# Altium PCB Toygether_PCB.PcbDoc
Units mm, origin at the board's own origin, x right, y up, seen from the top; angles counter-clockwise.
Board outline 40 x 40 mm, 2 copper layers (Top Layer, Bottom Layer); 33 components, 33 nets, 150 pads, 0 vias.
Unrouted connection lines stored in the file: 58.
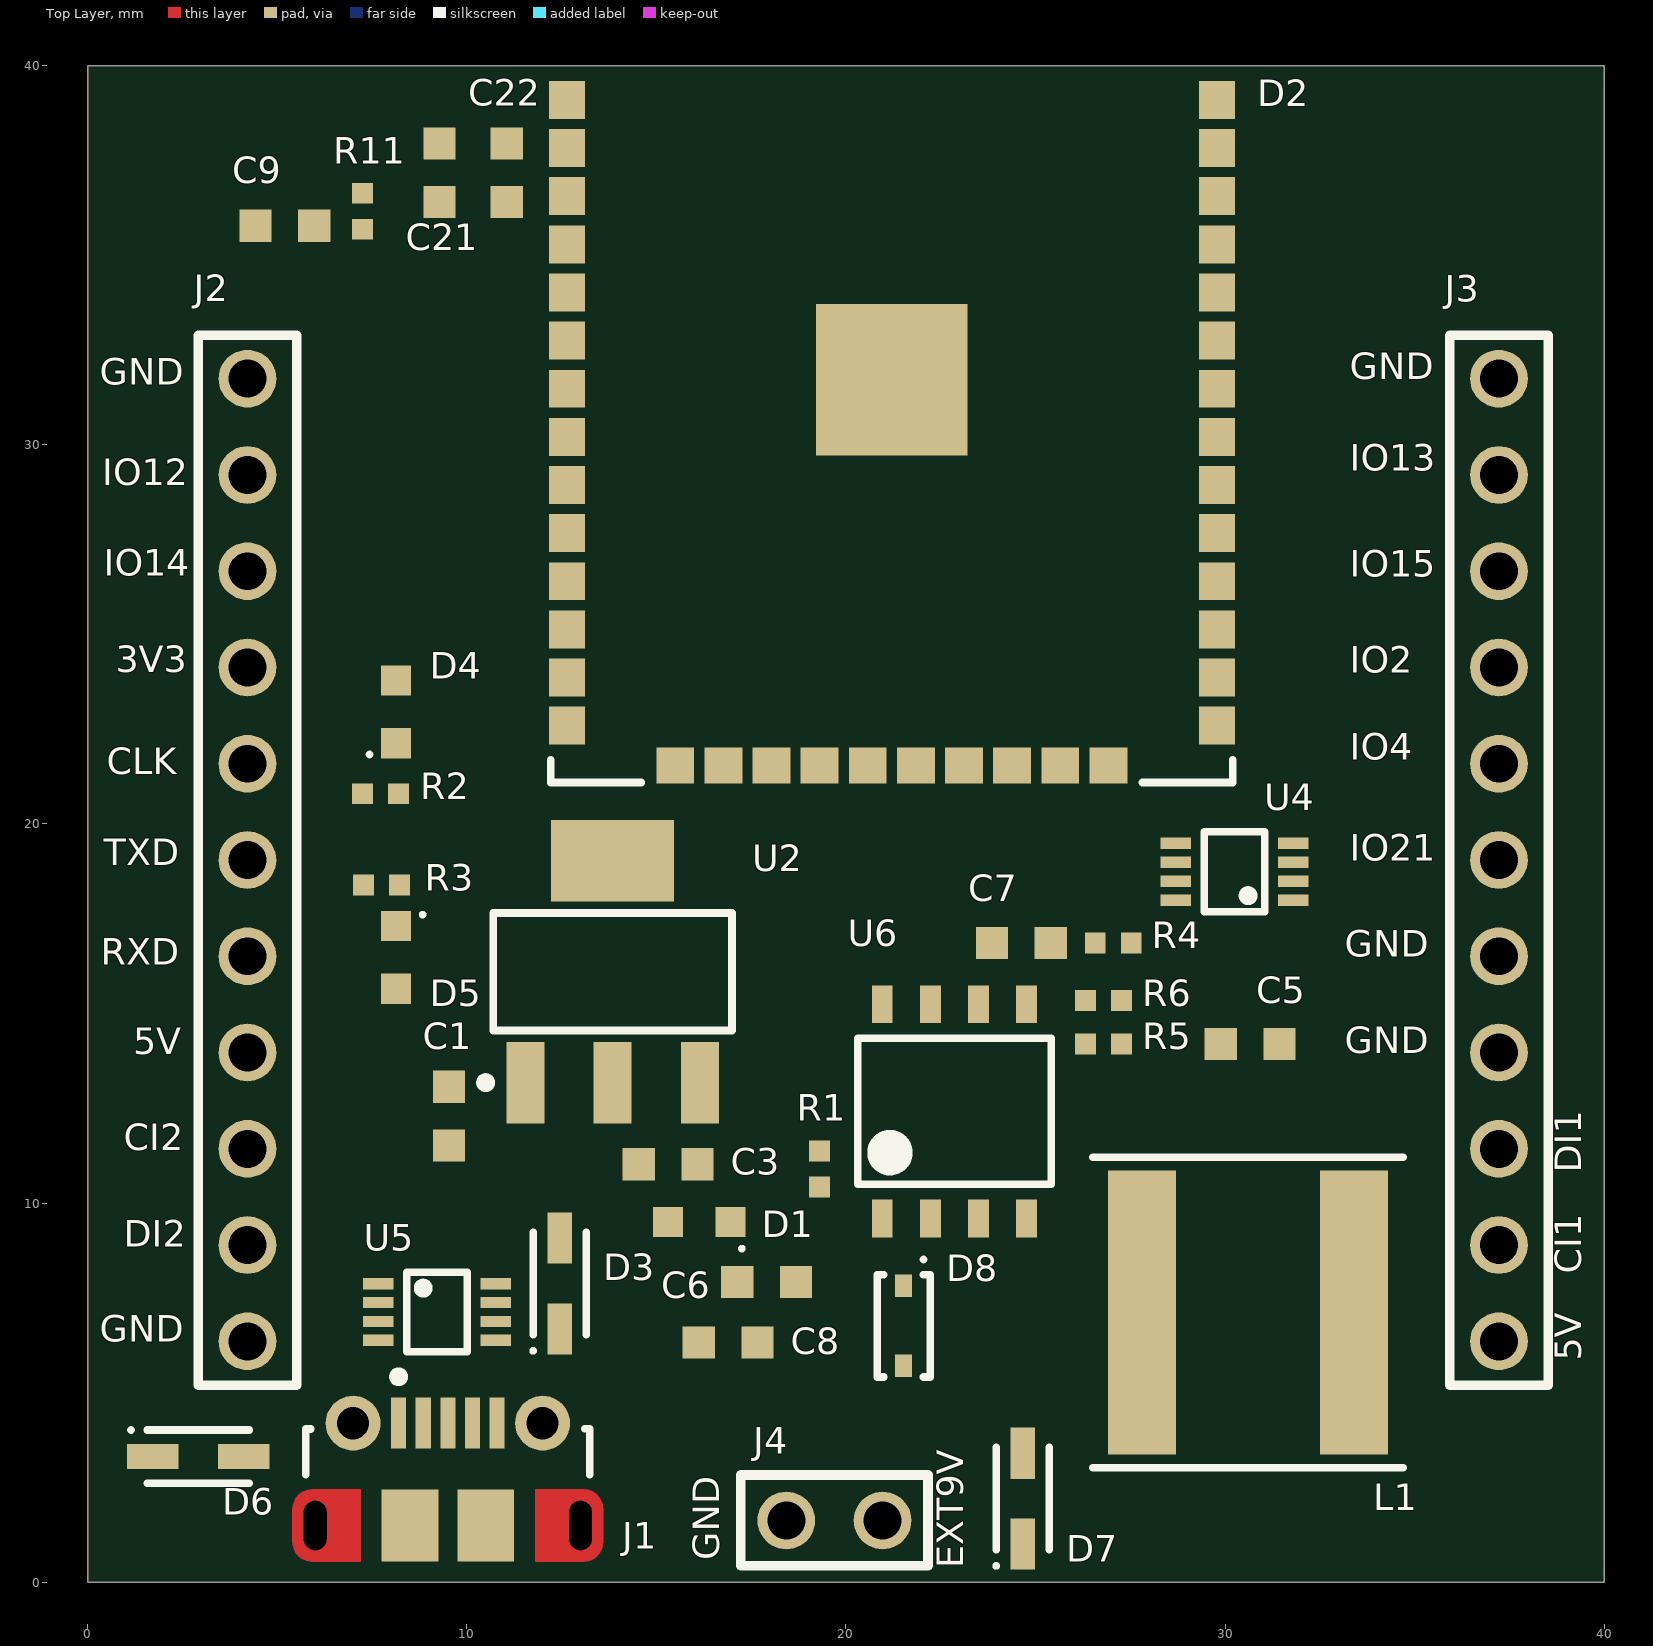
[diagram p0: Top Layer view]
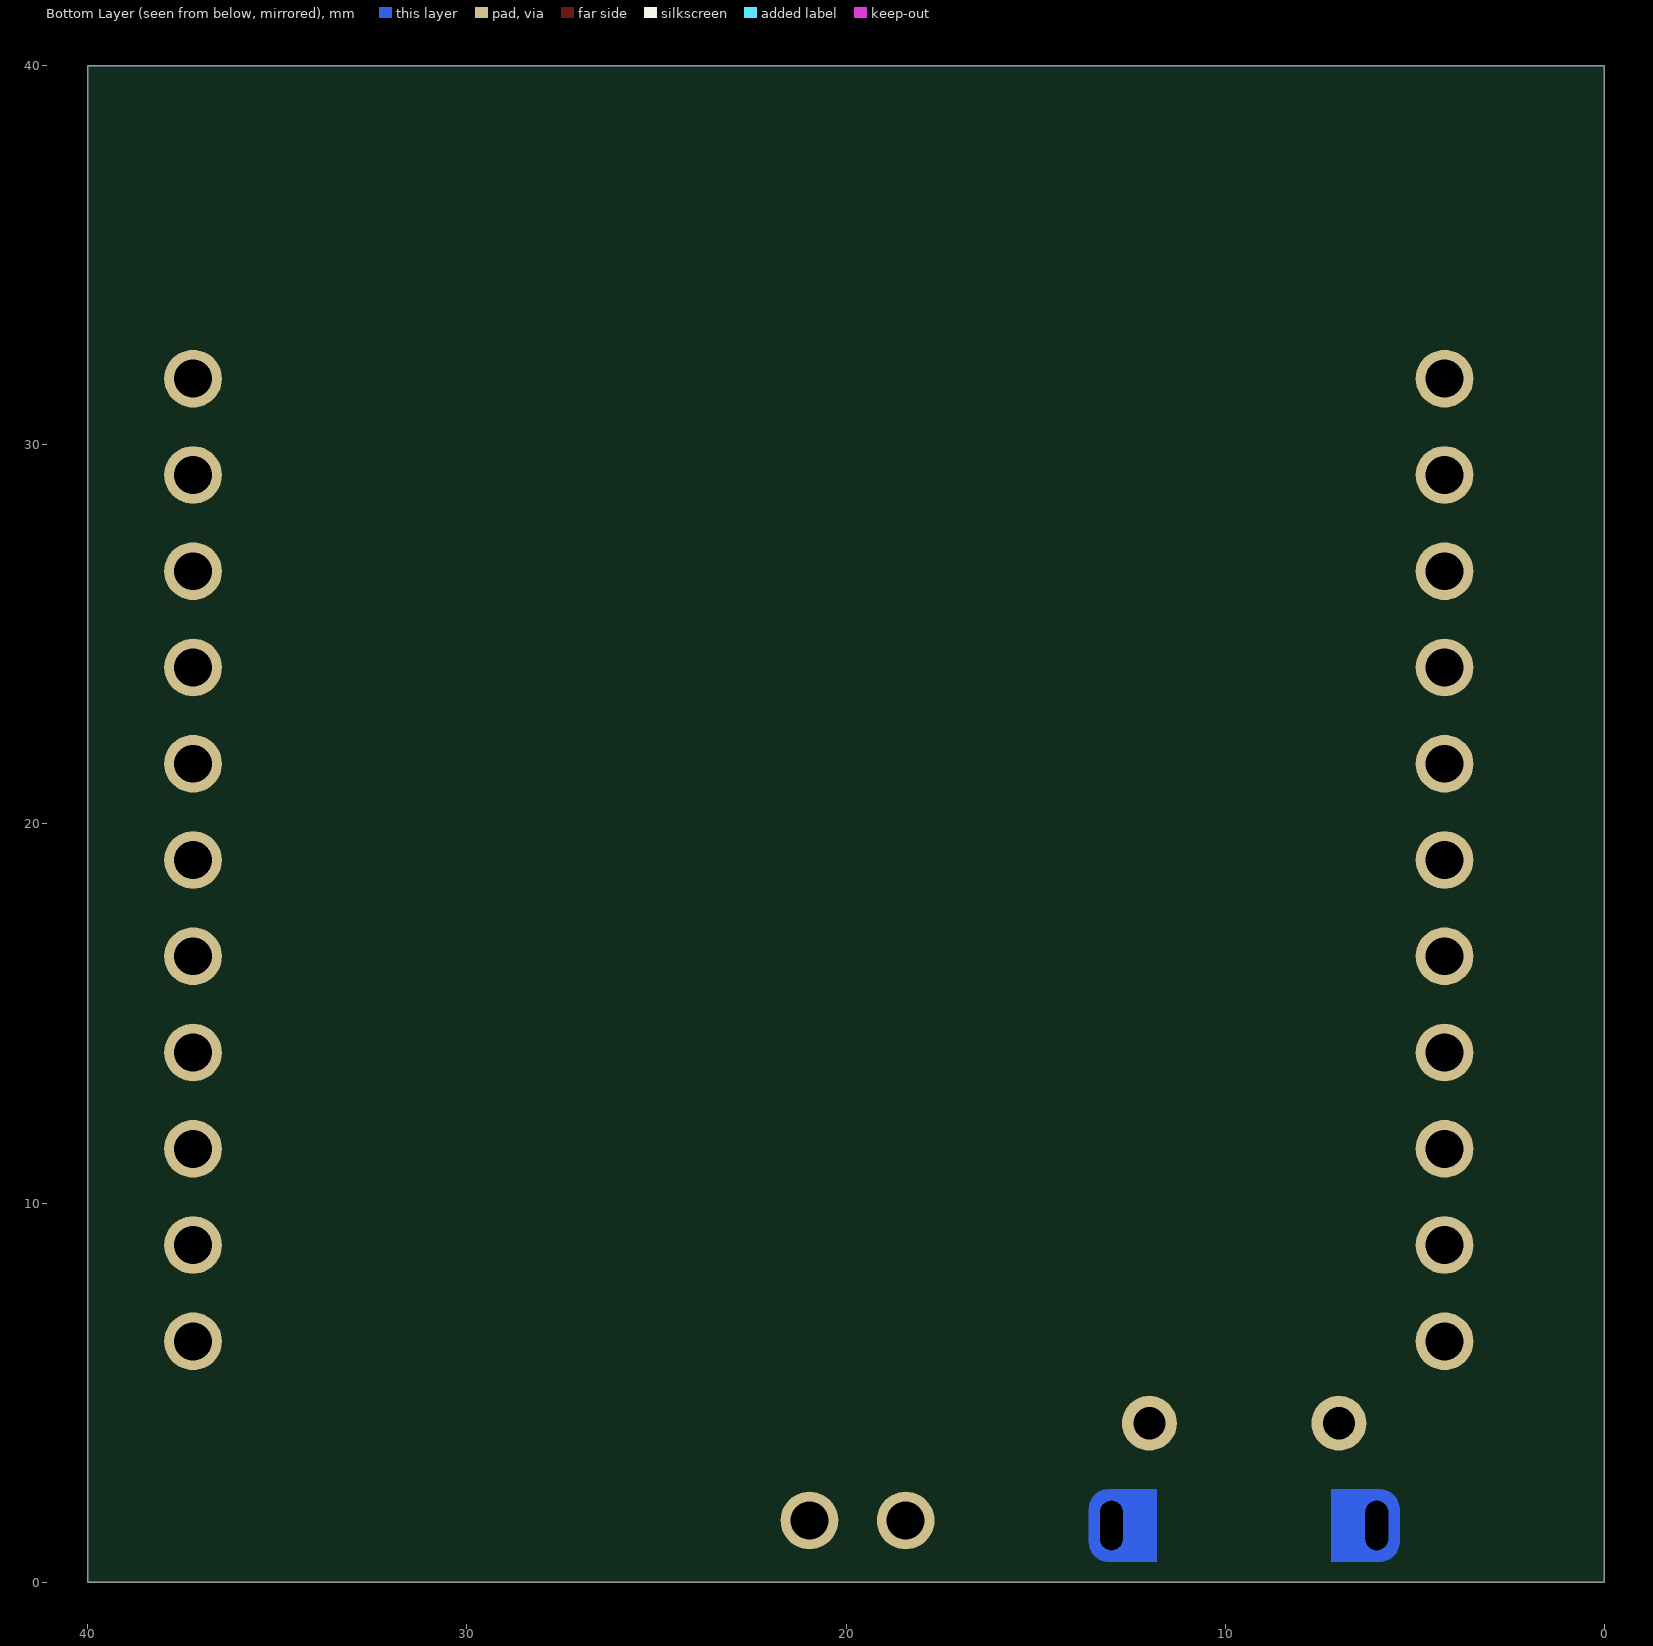
[diagram p1: Bottom Layer view, seen from below]

## Layer stack, top to bottom
Top Solder: solder mask 0.0102, Solder Resist, Dk 3.5
Top Layer: signal copper 0.0356
Dielectric 1: dielectric 0.32, FR-4, Dk 4.8
Bottom Layer: signal copper 0.0356
Bottom Solder: solder mask 0.0102, Solder Resist, Dk 3.5

## Board outline
0,0 40,0 40,40 0,40

## Design rules (kind name [scope] priority, off if disabled: settings)
BoardOutlineClearance [All] p1: gap=0.3 ignorepadtopadclearanceinfootprint=FALSE
Clearance Clearance_1 [All] p1: gap=0.15 ignorepadtopadclearanceinfootprint=TRUE
HoleSize [All] p1: absolutevalues=TRUE maxlimit=2.54 minlimit=0.3 maxpercent=80.000 minpercent=20.000
HoleToHoleClearance [All] p1: gap=0.5 allowstackedmicrovias=TRUE
MinimumSolderMaskSliver [All] p1: minsoldermaskwidth=0.1
PlaneConnect [All] p1: planeconnectstyle=Relief reliefexpansion=0.3 reliefentries=4 reliefconductorwidth=0.2 reliefairgap=0.2
PolygonConnect [All] p1: connectstyle=Relief reliefconductorwidth=0.254 reliefentries=4 polygonreliefangle="90 Angle" airgapwidth=0.254
RoutingVias [All] p1: holewidth=0.5 width=1.2 viastyle="Through Hole" minholewidth=0.3 minwidth=1 maxholewidth=1.5 maxwidth=2.5
SilkToSilkClearance [All] p1: silktosilkclearance=0.15
SilkToSolderMaskClearance [IsPad] p1: minsilkscreentomaskgap=0.15 clearancetoexposedcopper=TRUE
SolderMaskExpansion [All] p1: expansion=0.05
UnRoutedNet [All] p1: checkbadconnections=TRUE
Width [All] p1: maxlimit=2 minlimit=0.15 preferedwidth=0.2
23 further rules are at their usual default settings.

## Components (designator, comment, footprint, x,y, rotation, side; value= is the part's Value field where it differs from the comment)
C1 "22uF/10V(20%)" CAPC0603 9.525,12.291 r270 top
C3 "22uF/10V(20%)" CAPC0603 15.304,11.021 r0 top
C5 "22uF/10V(20%)" CAPC0603 30.664,14.196 r180 top
C6 "10µF/35V(20%)" CAPC0603 17.907,7.916 r180 top
C7 "2.2nF/6.3V(10%)" CAPC0603 24.625,16.863 r180 top
C8 "10nF/50V(10%)" CAPC0603 16.891,6.322 r0 top
C9 "0.1uF/50V(10%)" CAPC0603 5.194,35.786 r0 top
C21 "22uF/10V(20%)" CAPC0603 9.271,37.183 r270 top
C22 "0.1uF/50V(10%)" CAPC0603 11.049,37.183 r270 top
D1 "SML-D12U1WT86" SML-D12U1WT86 16.129,9.497 r180 top
D2 "ESP32-WROOM-32" OLMX-ESP-WROOM-32 21.209,30.325 r0 top
D3 "BAT760" SOD-323-SCHOTTKY_DIODE-30V/0.5A 12.446,7.874 r90 top
D4 "SML-D12U1WT86" SML-D12U1WT86 8.128,22.959 r90 top
D5 "SML-D12U1WT86" SML-D12U1WT86 8.128,16.482 r270 top
D6 "CDSOD323" SOD-323-SCHOTTKY_DIODE-30V/0.5A 2.91,3.31 r0 top
D7 "BAT760" SOD-323-SCHOTTKY_DIODE-30V/0.5A 24.663,2.199 r90 top
D8 "B140WS-7" SOD-323-SCHOTTKY_DIODE-40V/1A 21.52,6.76 r270 top
J1 "47491-0001" USB-MICRO-B_V 9.505,2.859 r0 top
J2 "CON_11P" PINS_HEADER-11 4.207,6.35 r90 top
J3 "CON_11P" PINS_HEADER-11 37.227,6.35 r90 top
J4 "CON_2P" PINS_ALIM-2 20.965,1.624 r180 top
L1 "15uH/2.4A" NRS8040-SELF-15uH/2.4A 30.607,7.112 r0 top
R1 "2K(5%)" RC0402 19.304,10.894 r90 top
R2 "2K(5%)" RC0402 7.714,20.8 r180 top
R3 "2K(5%)" RC0402 7.747,18.387 r180 top
R4 "15K(5%)" RC0402 27.051,16.863 r180 top
R5 "28.7K(1%)" RC0402 26.797,14.196 r0 top
R6 "10K(1%)" RC0402 26.797,15.339 r180 top
R11 "10K(5%)" RC0402 7.239,36.167 r90 top
U2 "LM1117IMP3.3/NOPB" LM1117 13.843,16.101 r90 top
U4 "SN74LVC2T45DCTRE4" VOLTAGE_TRANSLATOR_3.3-5V 30.25,18.74 r180 top
U5 "SN74LVC2T45DCTRE4" VOLTAGE_TRANSLATOR_3.3-5V 9.205,7.124 r0 top
U6 "ACT4060ASH-T" SWITCHING_VOLTAGE_REGULATOR 22.86,12.418 r90 top

## Footprints (in the part's own frame and the unit in brackets; to place one, negate y for a bottom-side part, rotate by r counter-clockwise, add the part's x,y. Pads: shape width x height; smd on the part's side, far side on the other; paste and mask are expansions set on the pad)
CAPC0603 [mm] "Chip Capacitor, 2-Leads, Body 1,60x0,80mm, IPC Medium Density"
  rect 0.85x0.85 smd: 1(-0.775,0) 2(0.775,0)
  body extent -0.9,-0.5 0.9,0.5, height 1
LM1117 [mm] "SOT223, 4-Leads, Body 6,50x7,00mm (avg), Pitch 2,30mm, IPC Medium Density"
  rect 2.15x1 smd: 1(-2.925,2.3) 2(-2.925,0) 3(-2.925,-2.3)
  rect 2.15x3.25 smd: 4(2.925,0)
  silkscreen extent -3.05,-3.15 1.55,3.47, body extent -3.5,-3.15 3.5,3.15, height 1.8
NRS8040-SELF-15uH/2.4A [mm] "Precision Wire Wound Inductor, 2-Leads, Body 8,00x8,00mm, IPC Medium Density"
  rect 1.8x7.5 smd: 1(-2.8,0) 2(2.8,0)
  silkscreen extent -4.1,-4.1 4.1,4.1, body extent -4.1,-4 4.1,4, height 4.1
OLMX-ESP-WROOM-32 [mm] "SMD, 38-Leads, Body 18x25.5mm, Pitch 1.27mm"
  rect 0.95x1 smd: 1(-8.575,8.78) 2(-8.575,7.51) 3(-8.575,6.24) 4(-8.575,4.97) 5(-8.575,3.7) 6(-8.575,2.43) 7(-8.575,1.16) 8(-8.575,-0.11) 9(-8.575,-1.38) 10(-8.575,-2.65) 11(-8.575,-3.92) 12(-8.575,-5.19) 13(-8.575,-6.46) 14(-8.575,-7.73) 25(8.575,-7.73) 26(8.575,-6.46) 27(8.575,-5.19) 28(8.575,-3.92) 29(8.575,-2.65) 30(8.575,-1.38) 31(8.575,-0.11) 32(8.575,1.16) 33(8.575,2.43) 34(8.575,3.7) 35(8.575,4.97) 36(8.575,6.24) 37(8.575,7.51) 38(8.575,8.78)
  rect 4x4 smd: 1(0,1.395)
  rect 1x0.95 smd: 15(-5.715,-8.78) 16(-4.445,-8.78) 17(-3.175,-8.78) 18(-1.905,-8.78) 19(-0.635,-8.78) 20(0.635,-8.78) 21(1.905,-8.78) 22(3.175,-8.78) 23(4.445,-8.78) 24(5.715,-8.78)
  silkscreen extent -9,-9.23 9,-8.63, body extent -9.04,-9.25 9.04,16.29, height 3.04
PINS_ALIM-2 [mil]
  round 60 hole 39.37: 1(0,0) 2(100,0)
  silkscreen extent -47,-47 147,47
PINS_HEADER-11 [mil]
  round 60 hole 39.37: 1(0,0) 2(100,0) 3(200,0) 4(300,0) 5(400,0) 6(500,0) 7(600,0) 8(700,0) 9(800,0) 10(900,0) 11(1000,0)
  silkscreen extent -45,-51 1045,51
RC0402 [mm] "Chip Resistor, 2-Leads, Body 1,02x0,50mm, IPC Medium Density"
  rect 0.55x0.55 smd: 1(-0.475,0) 2(0.475,0)
  body extent -0.53,-0.28 0.53,0.28, height 0.4
SML-D12U1WT86 [mm] "Molded Diode, 2-Leads, Body 1,60x0,80mm, IPC Medium Density"
  rect 0.8x0.8 smd: 1(-0.825,0) 2(0.825,0)
  silkscreen extent -1.17,0.65 -1.08,0.75, body extent -1.07,-0.45 1.07,0.45, height 0.65
SOD-323-SCHOTTKY_DIODE-30V/0.5A [mm] "Molded Diode, 2-Leads, Body 2,50x1,30mm, IPC Medium Density"
  rect 1.35x0.65 smd: 1(-1.2,0) 2(1.2,0)
  silkscreen extent -1.82,-0.7 1.35,0.75, body extent -1.57,-0.7 1.57,0.7, height 1.1
SOD-323-SCHOTTKY_DIODE-40V/1A [mm]
  rect 0.59x0.45 smd: 1(-1.055,0) 2(1.055,0)
  silkscreen extent -1.8,-0.7 1.35,0.7, body extent -1.57,-0.7 1.57,0.7, height 1.1
SWITCHING_VOLTAGE_REGULATOR [mm]
  rect 1x0.55 smd: 1(-2.825,1.905) 2(-2.825,0.635) 3(-2.825,-0.635) 4(-2.825,-1.905) 5(2.825,-1.905) 6(2.825,-0.635) 7(2.825,0.635) 8(2.825,1.905)
  silkscreen extent -1.93,-2.55 1.93,2.55, body extent -3.03,-2.55 3.03,2.55, height 1.75
USB-MICRO-B_V [mm] "USB, MICRO B, Body 7.491x4.695 mm, Pitch 0.65 mm"
  rect 0.4x1.35 smd: 1(-1.31,1.332) 2(-0.66,1.332) 3(-0.01,1.332) 4(0.64,1.332) 5(1.29,1.332)
  rrect50% 0x0 hole 0.6 slot 1.3 at 90 deg: 8(-3.51,-1.368) 11(3.49,-1.368)
  round 1.45 hole 0.85: ""(-2.51,1.332) ""(2.49,1.332)
  rect 1.5x1.9 smd: ""(-1.01,-1.368) ""(0.99,-1.368)
  Multi-Layer circle w0.5: c-3.61,-1.818 r0.25
  Multi-Layer circle w0.5: c-3.61,-0.918 r0.25
  Multi-Layer circle w0.5: c3.59,-0.918 r0.25
  Multi-Layer circle w0.5: c3.59,-1.818 r0.25
  Multi-Layer region: -2.31,-2.318 -2.31,-0.418 -3.61,-0.418 -3.61,-2.318
  Multi-Layer region: -3.61,-1.818 -3.61,-0.918 -4.11,-0.918 -4.11,-1.818
  Multi-Layer region: 2.29,-0.418 2.29,-2.318 3.59,-2.318 3.59,-0.418
  Multi-Layer region: 3.59,-0.918 3.59,-1.818 4.09,-1.818 4.09,-0.918
  silkscreen extent -3.76,-0.03 3.74,2.68, body extent -4.11,-3.92 4.09,1.48, height 2.67
VOLTAGE_TRANSLATOR_3.3-5V [mm] "TSSOP, 8-Leads, Body 2,00x2,30mm, Pitch 0,50mm, IPC Medium Density"
  rect 0.8x0.3 smd: 1(-1.55,0.75) 2(-1.55,0.25) 3(-1.55,-0.25) 4(-1.55,-0.75) 5(1.55,-0.75) 6(1.55,-0.25) 7(1.55,0.25) 8(1.55,0.75)
  silkscreen extent -0.8,-1.05 0.8,1.05, body extent -1.55,-1.05 1.55,1.05, height 0.9

## Part data
C1 C3 C5 C21: library part CAP-22uF/10V(20%), "GRM188R61A226ME15D-22uF/10V(20%)", Supplier Part Number 1=490-10476-6-ND, Supplier 1=Digi-Key
C6: library part CAP-10µF/35V(20%), "C0603C106M8PACTU", Supplier Part Number 1=80-C0603C106M8PACTU, Supplier 1=Mouser
C7: library part CAP-2.2nF/6.3V(10%), "C0603X7R0J222K030BA", Supplier Part Number 1=810-C0603X7R0J222K0A, Supplier 1=Mouser
C8: library part CAP-10nF/50V(10%), "C1608X7R1H103K080AE", Supplier Part Number 1=810-C1608X7R1H103KAE, Supplier 1=Mouser
C9 C22: library part CAP-0.1uF/50V(10%), "GRM188R71H104KA93D-0.1uF/50V(10%)", Supplier Part Number 1=16520001, Supplier 1=Distrelec
D1 D4 D5: library part RED_LED, "SML-D12U1WT86-2.2V-20mA", Supplier Part Number 1=755-SML-D12U1WT86, Supplier 1=Mouser
D2: library part ESP-WROOM-32, Supplier Part Number 1=356-ESP-WROOM-32, Supplier 1=Mouser
D3 D7: library part SCHOTTKY_DIODE-30V/0.5A, "BAT760-7-Schottky Diodes & Rectifiers 0.5A 30V LF", Supplier Part Number 1=BAT760-7/BKN, Supplier 1=Avnet
D6: library part BIDIRECTIONAL_DIODE, "CDSOD323-T05LC - ESD Suppressors / TVS Diodes Bidirectional Ultra Low Cap", Supplier Part Number 1=652-CDSOD323-T05LC, Supplier 1=Mouser
D8: library part SCHOTTKY_DIODE-40V/3A, "Diode Schottky 40V 1A 2-Pin SOD-323 T/R", Supplier Part Number 1=621-B140WS-7, Supplier 1=Mouser
J1: library part USB_CON8, "USB Connectors MICRO USB B RECPT MIDDLE MNT ASSY", Supplier Part Number 1=30076400, Supplier 1=Distrelec
J2 J3: library part PINS_HEADER_11, "11 Positions Header, Breakaway Connector 0.100\" (2.54mm) Through Hole Tin"
J4: library part PIN_ALIM, "2 Positions Header, Breakaway Connector 0.100\" (2.54mm) Through Hole Tin"
L1: library part SELF-15uH/2.4A, "NRS8040T150MJGJ", Supplier Part Number 1=963-NRS8040T150MJGJ, Supplier 1=Mouser
R1 R2 R3: library part RESISTOR-2K(5%), "RC0402JR-072KL", Supplier Part Number 1=67R9979, Supplier 1=Newark
R4: library part RESISTOR-15K(5%), "RC0402JR-0715KL", Supplier Part Number 1=67R9973, Supplier 1=Newark
R5: library part RESISTOR-28.7K(1%), "RC0402JR-072K7L", Supplier Part Number 1=67R9981, Supplier 1=Newark
R6: library part RESISTOR-10K(1%), "RC0402F103CS", Supplier Part Number 1=1276-3530-6-ND, Supplier 1=Digi-Key
R11: library part RESISTOR-10K(5%), "RC0402JR-0710KL", Supplier Part Number 1=67R9964, Supplier 1=Newark
U2: library part LM1117-3.3, Supplier Part Number 1=173-06-781, Supplier 1=Distrelec
U4 U5: library part VOLTAGE_TRANSLATOR_3.3-5V, "Translation - Voltage Levels DUAL-BIT DUAL SUPPLY TRANSCEIVER", Supplier Part Number 1=9592768, Supplier 1=Farnell
U6: library part SWITCHING_VOLTAGE_REGULATOR, Supplier Part Number 1=107-ACT4060ASH-T, Supplier 1=Mouser

## Nets (pads, with @x,y where several pads share a name; then routed paths per layer and width w, separated by ;. In a path a pad name is that pad's centre, name@x,y a point inside that pad or via, vN(x,y) a via of type N, cw(c..) or ccw(c..) an arc to the next point about the centre after c; other vN are vias at no path point)
3V3: C3.2 C21.2 C22.2 D2.2 J2.8 R1.2 R11.2 U2.2 U2.4 U4.8 U5.8
5V: C1.2 C5.2 D3.2 J2.4 J3.1 L1.2 R5.2 U2.3 U4.1 U5.1
CI1: J3.2 U4.2
CI2: J2.3 U5.2
CLK: D2.20 J2.7
DI1: J3.3 U4.3
DI2: J2.2 U5.3
EXT_9V: D7.1 J4.1
GND: C1.1 C3.1 C5.1 C6.1 C9.1 C21.1 C22.1 D1.2 D2.1 D2.15 D2.38 D4.2 D5.2 D6.1 D8.1 J1.5 J2.1 J2.11 J3.4 J3.5 J3.11 J4.2 R4.1 R6.1 U2.1 U4.4 U4.5 U5.4 U5.5 U6.4
IO2: D2.24 J3.8
IO4: D2.26 J3.7
IO12: D2.14 J2.10
IO13: D2.16 J3.10
IO14: D2.13 J2.9
IO15: D2.23 J3.9
IO21: D2.33 J3.6
IO22: D2.36 U4.6
IO23: D2.37 U4.7
IO25: D2.10 U5.6
IO26: D2.11 U5.7
NetC6_2: C6.2 D7.2 U6.2
NetC7_1: C7.1 R4.2
NetC7_2: C7.2 U6.6
NetC8_1: C8.1 U6.1
NetC8_2: C8.2 D8.2 L1.1 U6.3
NetC9_2: C9.2 D2.3 R11.1
NetD1_1: D1.1 R1.1
NetD4_1: D4.1 R2.1
NetD5_1: D5.1 R3.1
NetR5_1: R5.1 R6.2 U6.5
RXD0: D2.34 J2.5 R3.2
TXD0: D2.35 J2.6 R2.2
VBUS: D3.1 D6.2 J1.1
pads on no net: D2.4 D2.5 D2.6 D2.7 D2.8 D2.9 D2.12 D2.17 D2.18 D2.19 D2.21 D2.22 D2.25 D2.27 D2.28 D2.29 D2.30 D2.31 D2.32 J1. J1.2 J1.3 J1.4 J1.8 J1.11 U6.7 U6.8

## Polygon pours and split planes (outlines as drawn)
GND on Top Layer "Top Layer-GND" (solid, remove dead copper, shelved, pour order 0): 0,0 40,0 40,40 0,40
GND on Bottom Layer "Bottom Layer-GND" (solid, remove dead copper, shelved, pour order 1): 0,0 40,0 40,40 0,40

## Silkscreen, mask and mechanical layers (free items; w line width, h text height)
Top Overlay:
  text "GND" at 33.29,31.496 h1.2
  text "GND" at 0.31,31.35 h1.2
  text "IO13" at 33.29,29.083 h1.2
  text "IO12" at 0.38,28.7 h1.2
  text "IO14" at 0.42,26.31 h1.2
  text "IO15" at 33.29,26.289 h1.2
  text "3V3" at 0.73,23.77 h1.2
  text "IO2" at 33.29,23.749 h1.2
  text "IO4" at 33.29,21.463 h1.2
  text "CLK" at 0.5,21.07 h1.2
  text "IO21" at 33.29,18.796 h1.2
  text "TXD" at 0.41,18.67 h1.2
  text "GND" at 33.163,16.256 h1.2
  text "RXD" at 0.33,16.05 h1.2
  text "GND" at 33.163,13.716 h1.2
  text "5V" at 1.192,13.69 h1.2
  text "CI2" at 0.938,11.15 h1.2
  text "DI1" at 39.64,10.795 h1.2 r90
  text "DI2" at 0.938,8.61 h1.2
  text "CI1" at 39.64,8.128 h1.2 r90
  text "GND" at 0.31,6.1 h1.2
  text "5V" at 39.64,5.842 h1.2 r90
  text "GND" at 16.89,0.57 h1.2 r90
  text "EXT9V" at 23.33,0.36 h1.2 r90
Mechanical 6:
  the board outline again, w0.254

## Text inside footprints (layer, text, board x,y; h text height)
J1: Mechanical 1 "PCB EDGE" at 2.295,-0.059 h0.3